# EAGLE board cog-1602-v0 (EAGLE 5.07)
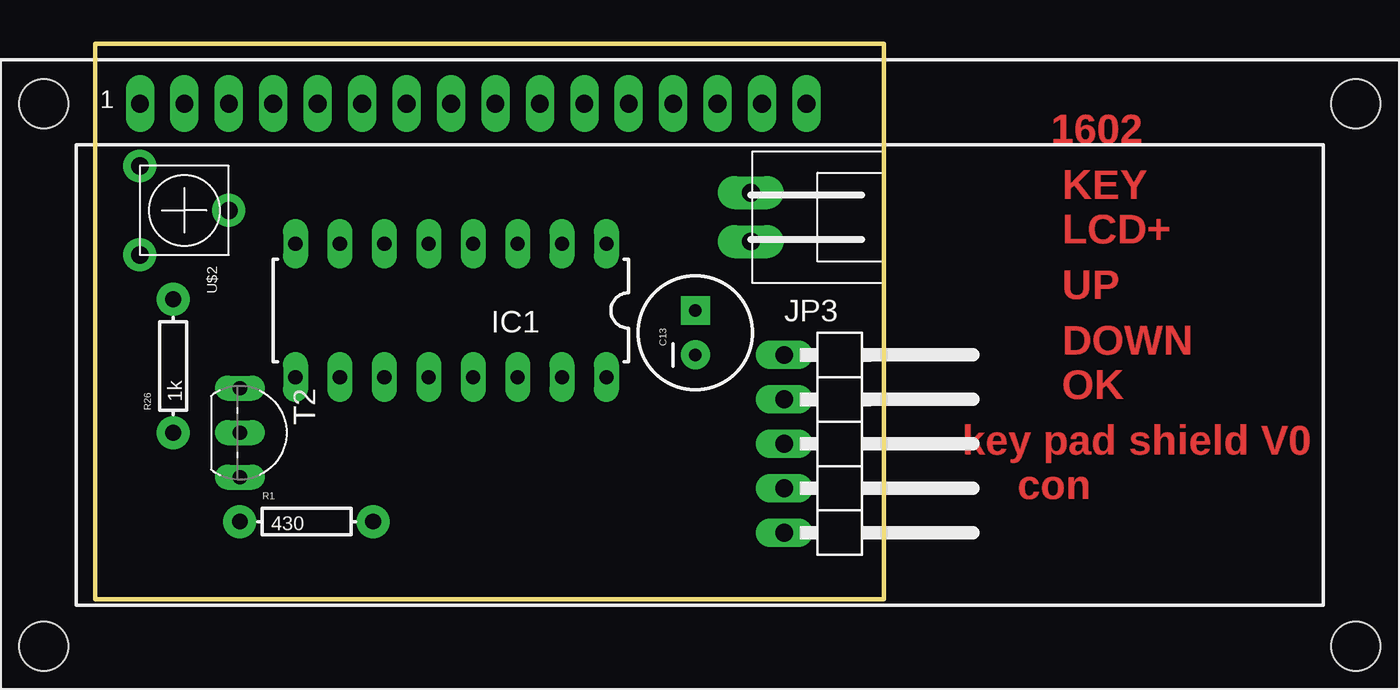
[diagram p0: board, top side]
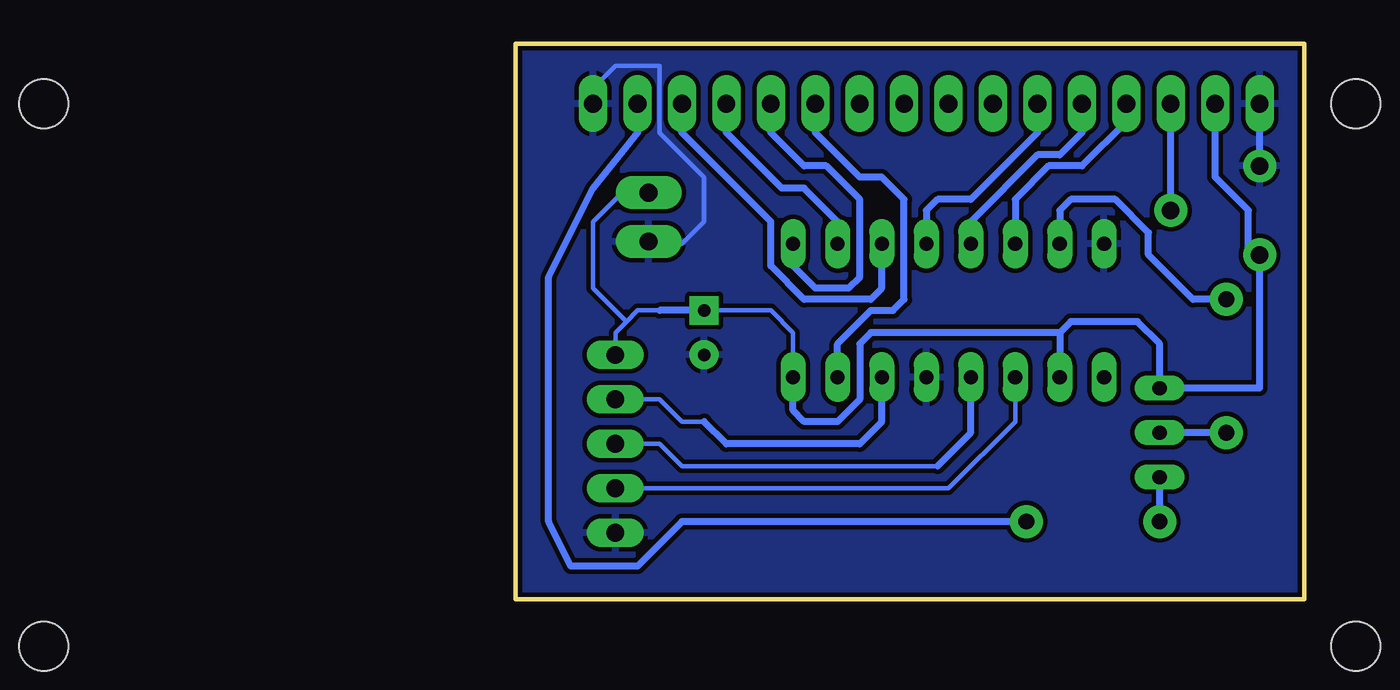
[diagram p1: board, bottom side, seen from below]

Size 45.09 x 31.75 mm. Coordinates in mm from the lower left corner, seen from the top.
Outline: 45.09,0 45.09,31.75 0,31.75 0,0 45.09,0
Copper layers (1*16): Top 0.035mm / dielectric 1.5mm / Bottom 0.035mm
Design rules "SparkFun": minimum track width 8mil, minimum drill 20mil, track to track 8mil, track to pad 8mil, pad to pad 8mil, via to via 8mil, smd to smd 8mil, copper to edge 10mil, drill to drill 8mil, minimum pad ring 12mil, minimum via ring 10mil, stop-mask expansion 4mil, vias tented up to drill 25mil, thermal gap 10mil

## Footprints (pad centres in the part's own frame; a part is rotated, then mirrored left to right if it is on the bottom)
CPOL-RADIAL-100UF-25V = drill 0.7 pad 1.651 square: 1 1.27,0 | drill 0.7 pad 1.651 round: 2 -1.27,0
DIL16 = drill 0.813 long: 1 -8.89,-3.81; 2 -6.35,-3.81; 3 -3.81,-3.81; 4 -1.27,-3.81; 5 1.27,-3.81; 6 3.81,-3.81; 7 6.35,-3.81; 8 8.89,-3.81; 9 8.89,3.81; 10 6.35,3.81; 11 3.81,3.81; 12 1.27,3.81; 13 -1.27,3.81; 14 -3.81,3.81; 15 -6.35,3.81; 16 -8.89,3.81
XH-1X2-LONG-LOCK = drill 1.016 pad 1.88 long: 1 -1.397,0; 2 1.397,0
1X05/90 = drill 1.016 long: 1 -5.08,-3.81; 2 -2.54,-3.81; 3 0,-3.81; 4 2.54,-3.81; 5 5.08,-3.81
AXIAL-0.3 = drill 0.9 pad 1.88 round: P$1 -3.81,0; P$2 3.81,0
TO92-EBC = drill 0.813 long: B 0,-1.27; C 2.54,-1.27; E -2.54,-1.27
LCD-16X2 = drill 1.016 long: 1 -32,15.5; 2 -29.46,15.5; 3 -26.92,15.5; 4 -24.38,15.5; 5 -21.84,15.5; 6 -19.3,15.5; 7 -16.76,15.5; 8 -14.22,15.5; 9 -11.68,15.5; 10 -9.14,15.5; 11 -6.6,15.5; 12 -4.06,15.5; 13 -1.52,15.5; 14 1.02,15.5; 15 3.56,15.5; 16 6.1,15.5 | hole 2.8: -37.5,15.5; -37.5,-15.5; 37.5,15.5; 37.5,-15.5
TRIM_POT_PTH = drill 1 pad 1.88 round: 1 -2.54,-2.54; 2 0,2.54; 3 2.54,-2.54

## Placement (x,y rotation side)
C13  10u  [CPOL-RADIAL-100UF-25V]  34.29,15.24 90 top
IC1  74LS595N  [DIL16]  20.32,16.51 180 top
JP1  [XH-1X2-LONG-LOCK]  37.46,21.84 270 top
JP3  [1X05/90]  43.18,8.89 270 top
R1  430  [AXIAL-0.3]  12.06,4.44 0 top
R26  1k  [AXIAL-0.3]  4.45,13.33 90 top
T2  8550  [TO92-EBC]  9.53,9.52 270 top
U$1  LCD-16X2  [LCD-16X2]  34.54,12.83 0 top
U$2  10k  [TRIM_POT_PTH]  5.08,22.22 270 top

## Library data of the parts
C13 IC1 U$2 = SparkFun
JP1 R1 R26 T2 U$1 = digital-toy
JP3 = pinhead

## Nets
GND: C13.2 IC1.8 IC1.13 JP1.2 JP3.5 U$1.1 U$1.16 U$2.1
N$1: IC1.15 U$1.11
N$2: IC1.1 U$1.12
N$3: IC1.2 U$1.13
N$4: IC1.3 U$1.14
N$5: IC1.4 U$1.6
N$6: IC1.5 U$1.5
N$7: IC1.6 U$1.4
N$8: IC1.7 R26.P$2
N$10: IC1.14 JP3.2
N$11: IC1.11 JP3.4
N$13: IC1.12 JP3.3
N$15: U$1.3 U$2.2
N$16: R1.P$2 U$1.15
N$19: R1.P$1 T2.C
N$55: R26.P$1 T2.B
VCC: C13.1 IC1.10 IC1.16 JP1.1 JP3.1 T2.E U$1.2 U$2.3

## Tracks (layer width: path | path; a pad name or v marks a point on that pad's centre or on a via)
GND
  Bottom 0.254: U$2.1 2.54,24.13 | U$1.16 40.64,29.21 39.37,30.48 36.83,30.48 36.83,26.67 34.29,24.13 34.29,21.59 35.56,20.32 37.34,20.32 JP1.2
  Bottom 0.406: 2.54,24.13 U$1.1
  pour Bottom (isolate 0.254): 85.09,43.18 92.08,-9.53 -9.52,-8.26 -16.51,34.29 -3.81,44.45
N$1
  Bottom 0.254: U$1.11 27.94,29.21
  Bottom 0.406: 27.94,29.21 27.94,26.67 25.4,24.13 24.13,24.13 22.86,22.86 22.86,17.14 23.49,16.51 24.77,16.51 26.67,14.6 IC1.15
N$2
  Bottom 0.254: 29.21,19.05 IC1.1 | U$1.12
  Bottom 0.406: 29.21,19.05 27.94,17.78 26.03,17.78 25.4,18.41 25.4,22.86 27.3,24.76 28.57,24.76 30.48,26.67 U$1.12
N$3
  Bottom 0.254: U$1.13
  Bottom 0.406: U$1.13 33.02,26.67 29.84,23.5 28.57,23.5 26.67,21.59 IC1.2
N$4
  Bottom 0.254: U$1.14
  Bottom 0.406: IC1.3 24.13,17.78 24.77,17.14 28.57,17.14 30.48,19.05 30.48,21.59 35.56,26.67 U$1.14
N$5
  Bottom 0.254: U$1.6
  Bottom 0.406: U$1.6 15.24,26.67 19.05,22.86 20.95,22.86 21.59,22.22 IC1.4
N$6
  Bottom 0.254: 19.05,21.59 IC1.5
  Bottom 0.406: U$1.5 12.7,26.67 13.97,25.4 15.24,25.4 19.05,21.59
N$7
  Bottom 0.254: U$1.4 10.16,27.3
  Bottom 0.406: 10.16,27.3 12.7,24.76 14.6,24.76 16.51,22.86 IC1.6
N$8
  Bottom 0.406: R26.P$2 6.35,17.14 8.89,19.68 8.89,20.96 10.79,22.86 13.33,22.86 13.97,22.22 IC1.7
N$10
  Bottom 0.254: 34.29,10.16 35.56,10.16 36.83,11.43 JP3.2
  Bottom 0.406: 34.29,10.16 33.02,8.89 25.4,8.89 24.13,10.16 IC1.14
N$11
  Bottom 0.254: JP3.4 20.32,6.35 16.51,10.16 IC1.11
N$13
  Bottom 0.254: 20.95,7.62 35.56,7.62 36.83,8.89 JP3.3
  Bottom 0.406: 20.95,7.62 19.05,9.52 IC1.12
N$15
  Bottom 0.406: U$1.3 7.62,25.4 U$2.2
N$16
  Bottom 0.254: U$1.15
  Bottom 0.406: U$1.15 38.1,26.67 40.64,23.5 43.18,18.41 43.18,4.44 41.91,1.9 38.1,1.9 35.56,4.44 R1.P$2
N$19
  Bottom 0.406: R1.P$1 T2.C
N$55
  Bottom 0.406: R26.P$1 T2.B
VCC
  Bottom 0.254: U$2.3 3.18,19.68 | 36.83,16.51 38.1,16.51 38.73,15.87 | 38.73,15.87 39.37,15.24 JP3.1 | IC1.16 29.21,15.24 30.48,16.51 C13.1 | JP1.1 38.99,23.24 40.64,21.59 40.64,17.78 38.73,15.87
  Bottom 0.406: C13.1 36.83,16.51 | U$1.2 5.08,24.13 3.18,22.22 3.18,19.68 | U$2.3 2.54,12.06 T2.E 8.26,14.6 9.53,15.87 13.33,15.87 13.97,15.24 | 13.97,15.24 24.77,15.24 25.4,14.6 25.4,11.43 26.67,10.16 28.57,10.16 29.21,10.79 IC1.16 | 13.97,15.24 IC1.10

## Text on the board
Top: 1602 | KEY | LCD+ | UP | DOWN | OK | key pad shield V0 | con